# Altium PCB Inverter45attempt.PcbDoc (part 2 of 3)
Units mm, origin at the board's own origin, x right, y up, seen from the top; angles counter-clockwise.
Board outline 150 x 150 mm, 2 copper layers (Top Layer, Bottom Layer), stack 1.74 mm thick; 275 components, 191 nets, 1690 pads, 661 vias.
Unrouted connection lines stored in the file: 411.
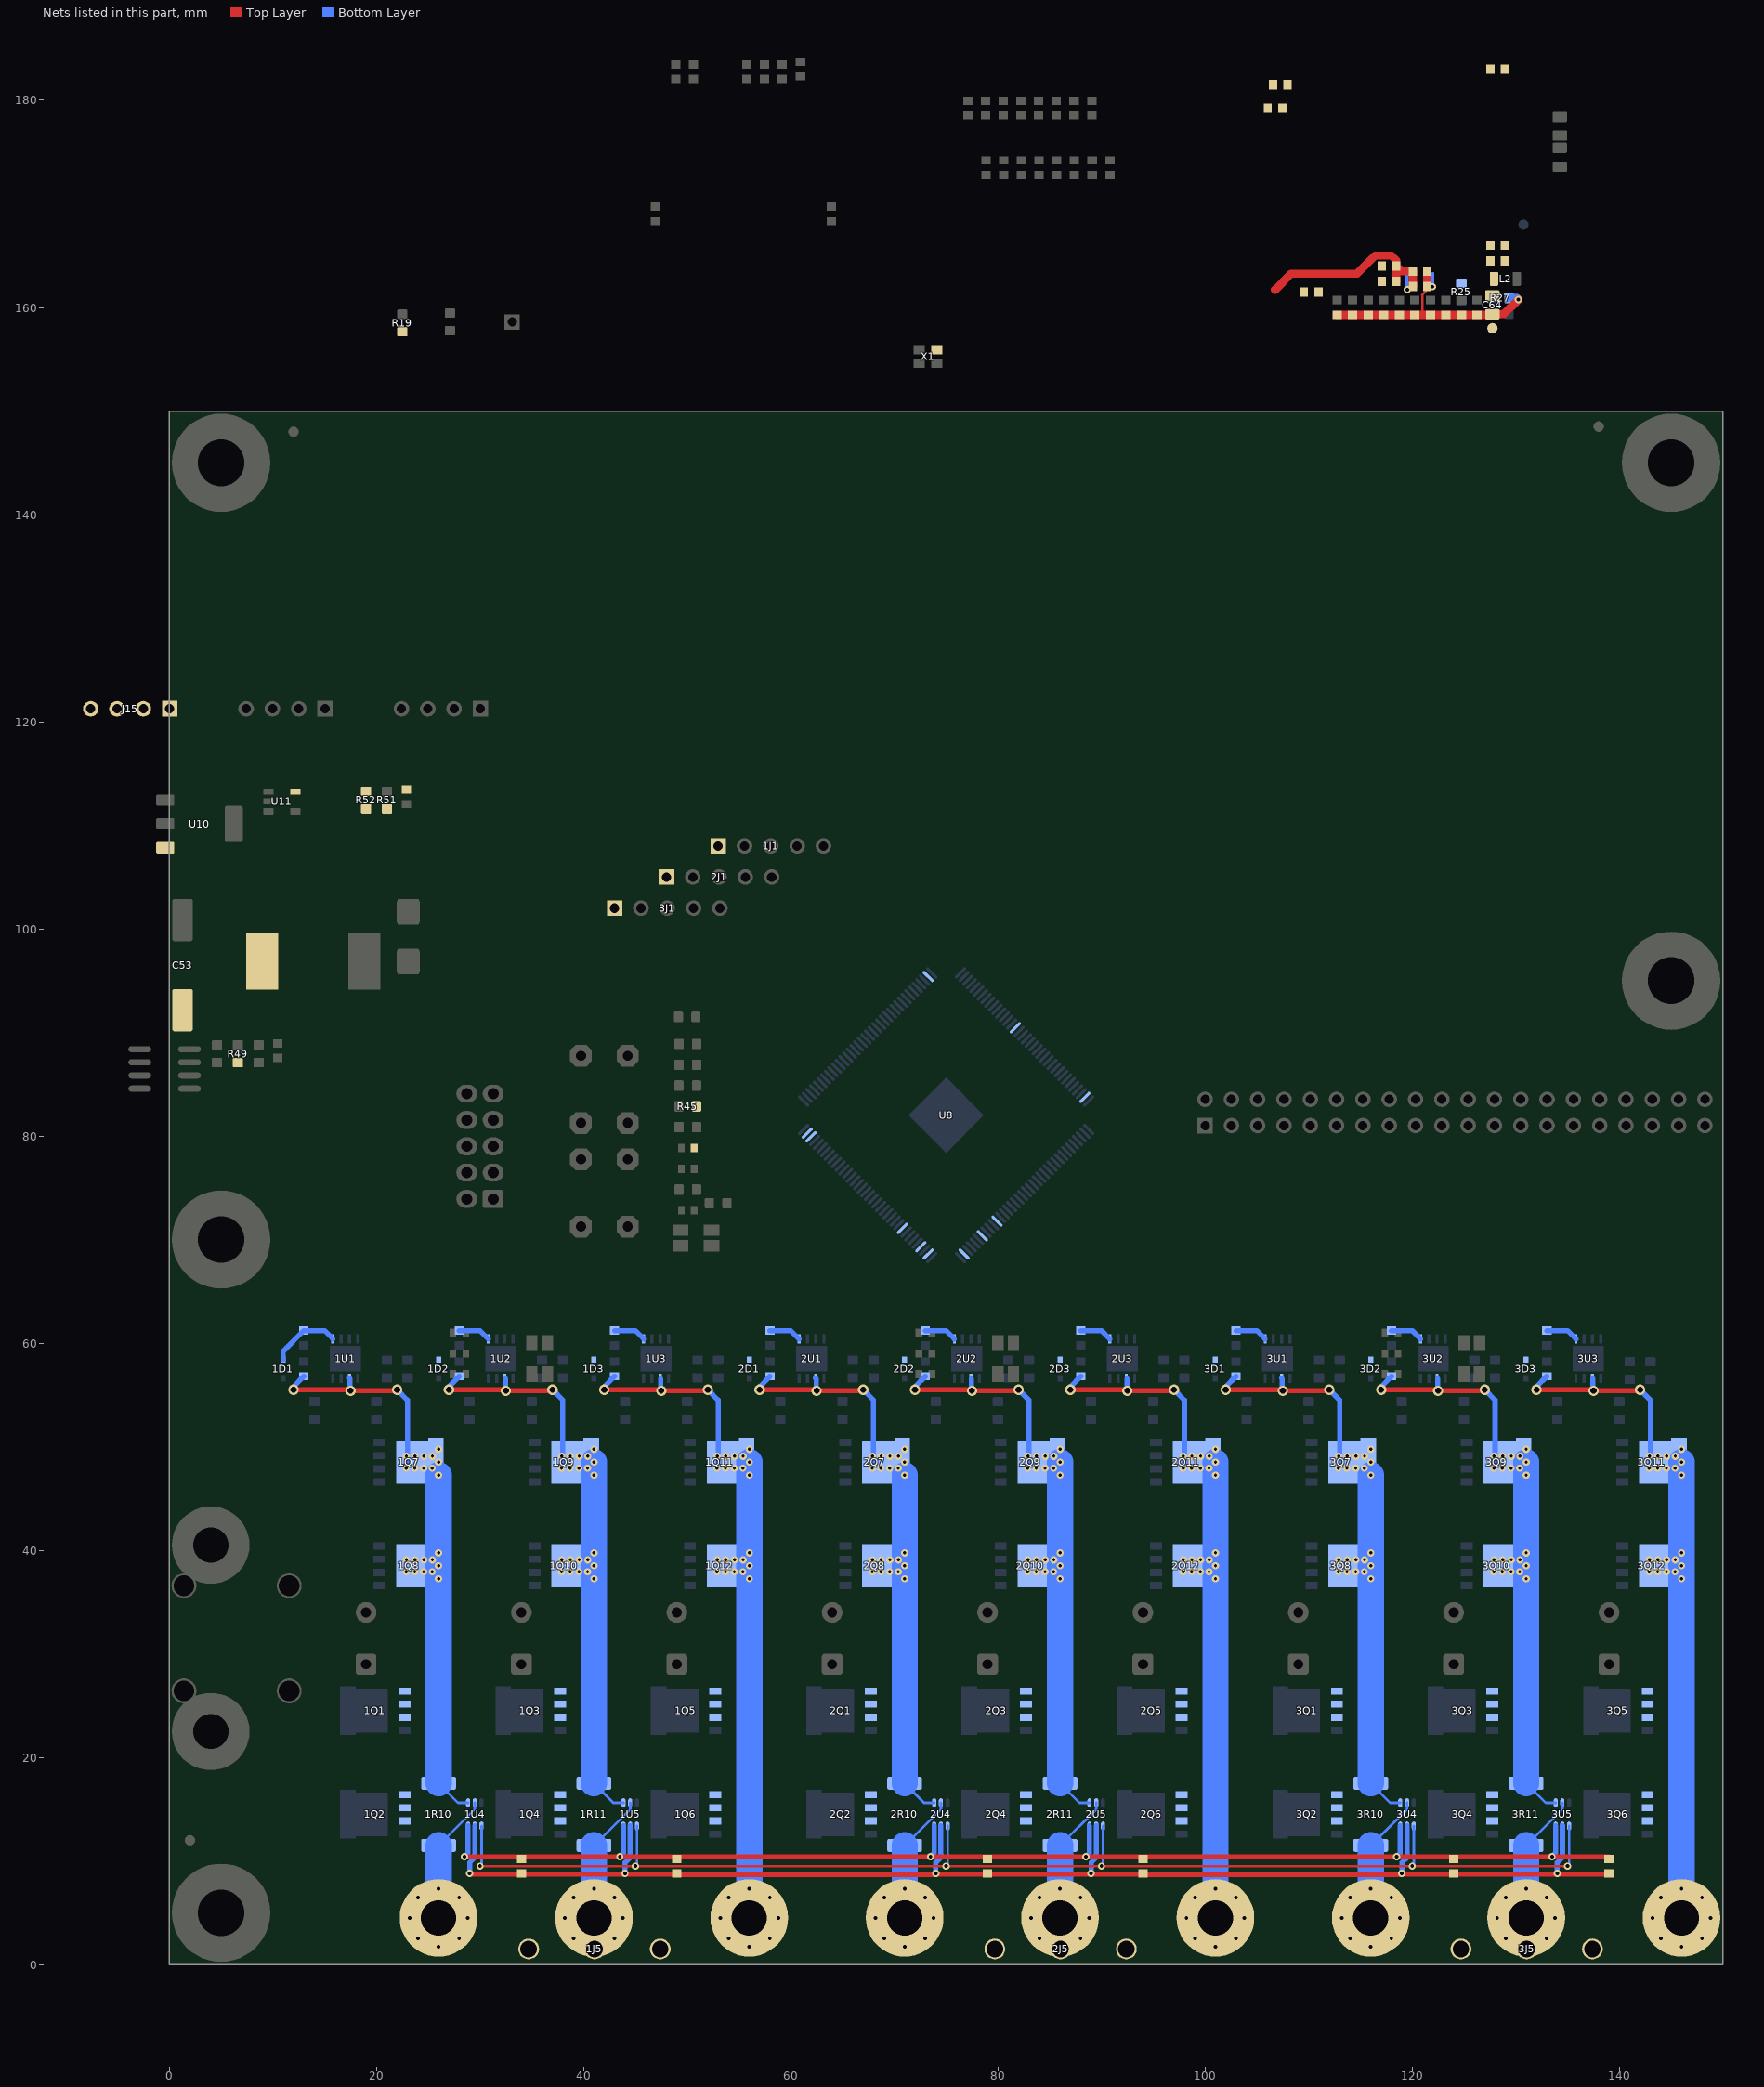
[diagram p2: the nets of this part, all layers, seen from the top]

## Part data (continued)
X1: "OSCILLATOR, SPXO, SG-210STF, 50 MHZ, SMD"

## Via types
v1: diameter 0.7, hole 0.3, Top Layer to Bottom Layer, 475 vias
v2: diameter 0.7, hole 0.35, Top Layer to Bottom Layer, 119 vias
v3: diameter 1.27, hole 0.5, Top Layer to Bottom Layer, 40 vias
v4: diameter 1, hole 0.6, Top Layer to Bottom Layer, 27 vias

## Nets (pads, with @x,y where several pads share a name; then routed paths per layer and width w, separated by ;. In a path a pad name is that pad's centre, name@x,y a point inside that pad or via, vN(x,y) a via of type N, cw(c..) or ccw(c..) an arc to the next point about the centre after c; other vN are vias at no path point)
1.65VREF: 1U4.1 1U5.1 2U4.1 2U5.1 3U4.1 3U5.1 R51.1 R52.2 | length 128.6
  Top Layer w0.254: v2(30,9.5) v2(45,9.5) v2(75,9.5) v2(90,9.5) v2(120,9.5) v2(135,9.5)
  Bottom Layer w0.254: v2(30,9.5) 30.15,9.65 1U4.1@30.15,13.375 ; v2(45,9.5) 45.15,9.65 1U5.1@45.15,13.375 ; v2(75,9.5) 75.15,9.65 2U4.1@75.15,13.375 ; v2(90,9.5) 90.15,9.65 2U5.1@90.15,13.375 ; v2(120,9.5) 120.15,9.65 3U4.1@120.15,13.375 ; v2(135,9.5) 135.15,9.65 3U5.1@135.15,13.375
1PH_A: 1J2.1 1J5.1 1R10.1 1U4.5 | length 12.6
  Bottom Layer w0.254: 1R10.1@26,11.5 29.5,15 1U4.5@29.5,15.625
  Bottom Layer w2.54: 1J2.1@26,4.5 v2(26,7.3) 1R10.1@26,11.5
  other v2: 26,1.7 24.02,2.52 27.98,2.52 23.2,4.5 28.8,4.5 24.02,6.48 27.98,6.48
1PH_A_Q: 1C4.1 1Q1.S 1Q2.S 1Q7.D 1Q8.D 1R10.2 1U1.6 1U4.4 | length 164.2
  Top Layer w0.5: v4(12,55.5) v4@17.4,55.5 ; v4(17.5,55.4) 21.9,55.4 v4(22,55.5)
  Bottom Layer w0.254: 1R10.2@26,17.5 27.875,15.625 1U4.4@28.85,15.625
  Bottom Layer w0.5: v4(12,55.5) 12,55.8 1C4.1@13,56.8 ; 1U1.6@17.4,56.605 17.45,56.555 17.45,55.45 v4(17.5,55.4) ; v4(22,55.5) 23,54.5 ; 1Q7.D@23,48.5 23,54.5 ; 1Q7.D@23,48.5 23,54.5 ; 1Q7.D@23,48.5 23,54.5 ; 1Q7.D@23,48.5 23,54.5 ; 1Q7.D@23,48.5 23,54.5 ; 1Q7.D@23,48.5 23,54.5 ; 1Q7.D@23,48.5 23,54.5 ; 1Q7.D@23,48.5 23,54.5 ; 1Q7.D@23,48.5 23,54.5 ; 1Q7.D@23,48.5 23,54.5 ; 1Q7.D@23,48.5 23,54.5 ; 1Q7.D@23,48.5 23,54.5 ; 1Q7.D@23,48.5 23,54.5 ; 1Q7.D@23,48.5 23,54.5
  Bottom Layer w2.54: 1R10.2@26,17.5 v1(26,37.25) ; v1(26,47.25) v1(26,39.75) ; v1(26,37.25) v1(26,38.5) ; v1(26,37.25) v1(26,38.5) ; v1(26,37.25) v1(26,38.5) ; v1(26,37.25) v1(26,38.5) ; v1(26,37.25) v1(26,38.5) ; v1(26,37.25) v1(26,38.5) ; v1(26,37.25) v1(26,38.5) ; v1(26,37.25) v1(26,38.5) ; v1(26,37.25) v1(26,38.5) ; v1(26,37.25) v1(26,38.5) ; v1(26,37.25) v1(26,38.5) ; v1(26,37.25) v1(26,38.5) ; v1(26,37.25) v1(26,38.5) ; v1(26,37.25) v1(26,38.5) ; v1(26,38.5) v1(26,39.75) ; v1(26,38.5) v1(26,39.75) ; v1(26,38.5) v1(26,39.75) ; v1(26,38.5) v1(26,39.75) ; v1(26,38.5) v1(26,39.75) ; v1(26,38.5) v1(26,39.75) ; v1(26,38.5) v1(26,39.75) ; v1(26,38.5) v1(26,39.75) ; v1(26,38.5) v1(26,39.75) ; v1(26,38.5) v1(26,39.75) ; v1(26,38.5) v1(26,39.75) ; v1(26,38.5) v1(26,39.75) ; v1(26,38.5) v1(26,39.75) ; v1(26,38.5) v1(26,39.75)
  other v1: 22.875,37.925 23.7,37.925 24.55,37.925 25.375,37.925 22.9,39.075 23.725,39.075 24.575,39.075 25.4,39.075 22.875,47.925 23.7,47.925 24.55,47.925 25.375,47.925 26,48.5 22.9,49.075 23.725,49.075 24.575,49.075 25.4,49.075 26,49.75
1PH_B: 1J3.1 1J5.2 1R11.1 1U5.5 | length 12.6
  Bottom Layer w0.254: 1R11.1@41,11.5 44.5,15 1U5.5@44.5,15.625
  Bottom Layer w2.54: 1J3.1@41,4.5 v2(41,7.3) 1R11.1@41,11.5
  other v2: 41,1.7 39.02,2.52 42.98,2.52 38.2,4.5 43.8,4.5 39.02,6.48 42.98,6.48
1PH_B_Q: 1C5.1 1Q3.S 1Q4.S 1Q9.D 1Q10.D 1R11.2 1U2.6 1U5.4 | length 181.1
  Top Layer w0.5: v4(27,55.5) v4@32.4,55.5 ; v4(32.5,55.4) v4@36.9,55.4
  Bottom Layer w0.254: 1R11.2@41,17.5 42.875,15.625 1U5.4@43.85,15.625
  Bottom Layer w0.5: v4@27,55.8 1C5.1@28,56.8 ; v4@32.45,55.45 1U2.6@32.45,56.555 ; v4(37,55.5) 38,54.5 ; 1Q9.D@38,48.5 38,54.5 ; 1Q9.D@38,48.5 38,54.5 ; 1Q9.D@38,48.5 38,54.5 ; 1Q9.D@38,48.5 38,54.5 ; 1Q9.D@38,48.5 38,54.5 ; 1Q9.D@38,48.5 38,54.5 ; 1Q9.D@38,48.5 38,54.5 ; 1Q9.D@38,48.5 38,54.5 ; 1Q9.D@38,48.5 38,54.5 ; 1Q9.D@38,48.5 38,54.5 ; 1Q9.D@38,48.5 38,54.5 ; 1Q9.D@38,48.5 38,54.5 ; 1Q9.D@38,48.5 38,54.5 ; 1Q9.D@38,48.5 38,54.5
  Bottom Layer w2.54: 1R11.2@41,17.5 v1(41,38.5) ; v1(41,37.25) v1(41,38.5) ; v1(41,37.25) v1(41,38.5) ; v1(41,37.25) v1(41,38.5) ; v1(41,37.25) v1(41,38.5) ; v1(41,37.25) v1(41,38.5) ; v1(41,37.25) v1(41,38.5) ; v1(41,37.25) v1(41,38.5) ; v1(41,37.25) v1(41,38.5) ; v1(41,37.25) v1(41,38.5) ; v1(41,37.25) v1(41,38.5) ; v1(41,37.25) v1(41,38.5) ; v1(41,37.25) v1(41,38.5) ; v1(41,37.25) v1(41,38.5) ; v1(41,38.5) v1(41,39.75) ; v1(41,38.5) v1(41,39.75) ; v1(41,38.5) v1(41,39.75) ; v1(41,38.5) v1(41,39.75) ; v1(41,38.5) v1(41,39.75) ; v1(41,38.5) v1(41,39.75) ; v1(41,38.5) v1(41,39.75) ; v1(41,38.5) v1(41,39.75) ; v1(41,38.5) v1(41,39.75) ; v1(41,38.5) v1(41,39.75) ; v1(41,38.5) v1(41,39.75) ; v1(41,38.5) v1(41,39.75) ; v1(41,38.5) v1(41,39.75) ; v1(41,38.5) v1(41,39.75) ; v1(41,39.75) v1(41,47.25) ; v1(41,47.25) v1(41,48.5) ; v1(41,47.25) v1(41,48.5) ; v1(41,47.25) v1(41,48.5) ; v1(41,47.25) v1(41,48.5) ; v1(41,47.25) v1(41,48.5) ; v1(41,47.25) v1(41,48.5) ; v1(41,47.25) v1(41,48.5) ; v1(41,47.25) v1(41,48.5) ; v1(41,47.25) v1(41,48.5) ; v1(41,47.25) v1(41,48.5) ; v1(41,47.25) v1(41,48.5) ; v1(41,47.25) v1(41,48.5) ; v1(41,47.25) v1(41,48.5) ; v1(41,47.25) v1(41,48.5)
  other v1: 37.875,37.925 38.7,37.925 39.55,37.925 40.375,37.925 37.9,39.075 38.725,39.075 39.575,39.075 40.4,39.075 37.875,47.925 38.7,47.925 39.55,47.925 40.375,47.925 37.9,49.075 38.725,49.075 39.575,49.075 40.4,49.075 41,49.75
1PH_C: 1C6.1 1J4.1 1J5.3 1Q5.S 1Q6.S 1Q11.D 1Q12.D 1U3.6 | length 190.5
  Top Layer w0.5: v4(42,55.5) v4@47.4,55.5 ; v4(47.5,55.4) v4@51.9,55.4
  Bottom Layer w0.5: v4@42,55.8 1C6.1@43,56.8 ; v4@47.45,55.45 1U3.6@47.45,56.555 ; v4(52,55.5) 53,54.5 ; 1Q11.D@53,48.5 53,54.5 ; 1Q11.D@53,48.5 53,54.5 ; 1Q11.D@53,48.5 53,54.5 ; 1Q11.D@53,48.5 53,54.5 ; 1Q11.D@53,48.5 53,54.5 ; 1Q11.D@53,48.5 53,54.5 ; 1Q11.D@53,48.5 53,54.5 ; 1Q11.D@53,48.5 53,54.5 ; 1Q11.D@53,48.5 53,54.5 ; 1Q11.D@53,48.5 53,54.5 ; 1Q11.D@53,48.5 53,54.5 ; 1Q11.D@53,48.5 53,54.5 ; 1Q11.D@53,48.5 53,54.5 ; 1Q11.D@53,48.5 53,54.5
  Bottom Layer w2.54: 1J4.1@56,4.5 v1(56,37.25) ; v1(56,37.25) v1(56,38.5) ; v1(56,37.25) v1(56,38.5) ; v1(56,37.25) v1(56,38.5) ; v1(56,37.25) v1(56,38.5) ; v1(56,37.25) v1(56,38.5) ; v1(56,37.25) v1(56,38.5) ; v1(56,37.25) v1(56,38.5) ; v1(56,37.25) v1(56,38.5) ; v1(56,37.25) v1(56,38.5) ; v1(56,37.25) v1(56,38.5) ; v1(56,37.25) v1(56,38.5) ; v1(56,37.25) v1(56,38.5) ; v1(56,37.25) v1(56,38.5) ; v1(56,37.25) v1(56,38.5) ; v1(56,38.5) v1(56,39.75) ; v1(56,38.5) v1(56,39.75) ; v1(56,38.5) v1(56,39.75) ; v1(56,38.5) v1(56,39.75) ; v1(56,38.5) v1(56,39.75) ; v1(56,38.5) v1(56,39.75) ; v1(56,38.5) v1(56,39.75) ; v1(56,38.5) v1(56,39.75) ; v1(56,38.5) v1(56,39.75) ; v1(56,38.5) v1(56,39.75) ; v1(56,38.5) v1(56,39.75) ; v1(56,38.5) v1(56,39.75) ; v1(56,38.5) v1(56,39.75) ; v1(56,38.5) v1(56,39.75) ; v1(56,39.75) v1(56,47.25) ; v1(56,47.25) v1(56,48.5) ; v1(56,47.25) v1(56,48.5) ; v1(56,47.25) v1(56,48.5) ; v1(56,47.25) v1(56,48.5) ; v1(56,47.25) v1(56,48.5) ; v1(56,47.25) v1(56,48.5) ; v1(56,47.25) v1(56,48.5) ; v1(56,47.25) v1(56,48.5) ; v1(56,47.25) v1(56,48.5) ; v1(56,47.25) v1(56,48.5) ; v1(56,47.25) v1(56,48.5) ; v1(56,47.25) v1(56,48.5) ; v1(56,47.25) v1(56,48.5) ; v1(56,47.25) v1(56,48.5)
  other v1: 52.875,37.925 53.7,37.925 54.55,37.925 55.375,37.925 52.9,39.075 53.725,39.075 54.575,39.075 55.4,39.075 52.875,47.925 53.7,47.925 54.55,47.925 55.375,47.925 52.9,49.075 53.725,49.075 54.575,49.075 55.4,49.075 56,49.75
  other v2: 56,1.7 54.02,2.52 57.98,2.52 53.2,4.5 58.8,4.5 54.02,6.48 57.98,6.48 56,7.3
2PH_A: 2J2.1 2J5.1 2R10.1 2U4.5 | length 12.6
  Bottom Layer w0.254: 2R10.1@71,11.5 74.5,15 2U4.5@74.5,15.625
  Bottom Layer w2.54: 2J2.1@71,4.5 v2(71,7.3) 2R10.1@71,11.5
  other v2: 71,1.7 69.02,2.52 72.98,2.52 68.2,4.5 73.8,4.5 69.02,6.48 72.98,6.48
2PH_A_Q: 2C4.1 2Q1.S 2Q2.S 2Q7.D 2Q8.D 2R10.2 2U1.6 2U4.4 | length 164.2
  Top Layer w0.5: v4(57,55.5) v4@62.4,55.5 ; v4(62.5,55.4) 66.9,55.4 v4(67,55.5)
  Bottom Layer w0.254: 2R10.2@71,17.5 72.875,15.625 2U4.4@73.85,15.625
  Bottom Layer w0.5: v4(57,55.5) 57,55.8 2C4.1@58,56.8 ; 2U1.6@62.4,56.605 62.45,56.555 62.45,55.45 v4(62.5,55.4) ; v4(67,55.5) 68,54.5 ; 2Q7.D@68,48.5 68,54.5 ; 2Q7.D@68,48.5 68,54.5 ; 2Q7.D@68,48.5 68,54.5 ; 2Q7.D@68,48.5 68,54.5 ; 2Q7.D@68,48.5 68,54.5 ; 2Q7.D@68,48.5 68,54.5 ; 2Q7.D@68,48.5 68,54.5 ; 2Q7.D@68,48.5 68,54.5 ; 2Q7.D@68,48.5 68,54.5 ; 2Q7.D@68,48.5 68,54.5 ; 2Q7.D@68,48.5 68,54.5 ; 2Q7.D@68,48.5 68,54.5 ; 2Q7.D@68,48.5 68,54.5 ; 2Q7.D@68,48.5 68,54.5
  Bottom Layer w2.54: 2R10.2@71,17.5 v1(71,37.25) ; v1(71,47.25) v1(71,39.75) ; v1(71,37.25) v1(71,38.5) ; v1(71,37.25) v1(71,38.5) ; v1(71,37.25) v1(71,38.5) ; v1(71,37.25) v1(71,38.5) ; v1(71,37.25) v1(71,38.5) ; v1(71,37.25) v1(71,38.5) ; v1(71,37.25) v1(71,38.5) ; v1(71,37.25) v1(71,38.5) ; v1(71,37.25) v1(71,38.5) ; v1(71,37.25) v1(71,38.5) ; v1(71,37.25) v1(71,38.5) ; v1(71,37.25) v1(71,38.5) ; v1(71,37.25) v1(71,38.5) ; v1(71,37.25) v1(71,38.5) ; v1(71,38.5) v1(71,39.75) ; v1(71,38.5) v1(71,39.75) ; v1(71,38.5) v1(71,39.75) ; v1(71,38.5) v1(71,39.75) ; v1(71,38.5) v1(71,39.75) ; v1(71,38.5) v1(71,39.75) ; v1(71,38.5) v1(71,39.75) ; v1(71,38.5) v1(71,39.75) ; v1(71,38.5) v1(71,39.75) ; v1(71,38.5) v1(71,39.75) ; v1(71,38.5) v1(71,39.75) ; v1(71,38.5) v1(71,39.75) ; v1(71,38.5) v1(71,39.75) ; v1(71,38.5) v1(71,39.75)
  other v1: 67.875,37.925 68.7,37.925 69.55,37.925 70.375,37.925 67.9,39.075 68.725,39.075 69.575,39.075 70.4,39.075 67.875,47.925 68.7,47.925 69.55,47.925 70.375,47.925 71,48.5 67.9,49.075 68.725,49.075 69.575,49.075 70.4,49.075 71,49.75
2PH_B: 2J3.1 2J5.2 2R11.1 2U5.5 | length 12.6
  Bottom Layer w0.254: 2R11.1@86,11.5 89.5,15 2U5.5@89.5,15.625
  Bottom Layer w2.54: 2J3.1@86,4.5 v2(86,7.3) 2R11.1@86,11.5
  other v2: 86,1.7 84.02,2.52 87.98,2.52 83.2,4.5 88.8,4.5 84.02,6.48 87.98,6.48
2PH_B_Q: 2C5.1 2Q3.S 2Q4.S 2Q9.D 2Q10.D 2R11.2 2U2.6 2U5.4 | length 181.1
  Top Layer w0.5: v4(72,55.5) v4@77.4,55.5 ; v4(77.5,55.4) v4@81.9,55.4
  Bottom Layer w0.254: 2R11.2@86,17.5 87.875,15.625 2U5.4@88.85,15.625
  Bottom Layer w0.5: v4@72,55.8 2C5.1@73,56.8 ; v4@77.45,55.45 2U2.6@77.45,56.555 ; v4(82,55.5) 83,54.5 ; 2Q9.D@83,48.5 83,54.5 ; 2Q9.D@83,48.5 83,54.5 ; 2Q9.D@83,48.5 83,54.5 ; 2Q9.D@83,48.5 83,54.5 ; 2Q9.D@83,48.5 83,54.5 ; 2Q9.D@83,48.5 83,54.5 ; 2Q9.D@83,48.5 83,54.5 ; 2Q9.D@83,48.5 83,54.5 ; 2Q9.D@83,48.5 83,54.5 ; 2Q9.D@83,48.5 83,54.5 ; 2Q9.D@83,48.5 83,54.5 ; 2Q9.D@83,48.5 83,54.5 ; 2Q9.D@83,48.5 83,54.5 ; 2Q9.D@83,48.5 83,54.5
  Bottom Layer w2.54: 2R11.2@86,17.5 v1(86,38.5) ; v1(86,37.25) v1(86,38.5) ; v1(86,37.25) v1(86,38.5) ; v1(86,37.25) v1(86,38.5) ; v1(86,37.25) v1(86,38.5) ; v1(86,37.25) v1(86,38.5) ; v1(86,37.25) v1(86,38.5) ; v1(86,37.25) v1(86,38.5) ; v1(86,37.25) v1(86,38.5) ; v1(86,37.25) v1(86,38.5) ; v1(86,37.25) v1(86,38.5) ; v1(86,37.25) v1(86,38.5) ; v1(86,37.25) v1(86,38.5) ; v1(86,37.25) v1(86,38.5) ; v1(86,38.5) v1(86,39.75) ; v1(86,38.5) v1(86,39.75) ; v1(86,38.5) v1(86,39.75) ; v1(86,38.5) v1(86,39.75) ; v1(86,38.5) v1(86,39.75) ; v1(86,38.5) v1(86,39.75) ; v1(86,38.5) v1(86,39.75) ; v1(86,38.5) v1(86,39.75) ; v1(86,38.5) v1(86,39.75) ; v1(86,38.5) v1(86,39.75) ; v1(86,38.5) v1(86,39.75) ; v1(86,38.5) v1(86,39.75) ; v1(86,38.5) v1(86,39.75) ; v1(86,38.5) v1(86,39.75) ; v1(86,39.75) v1(86,47.25) ; v1(86,47.25) v1(86,48.5) ; v1(86,47.25) v1(86,48.5) ; v1(86,47.25) v1(86,48.5) ; v1(86,47.25) v1(86,48.5) ; v1(86,47.25) v1(86,48.5) ; v1(86,47.25) v1(86,48.5) ; v1(86,47.25) v1(86,48.5) ; v1(86,47.25) v1(86,48.5) ; v1(86,47.25) v1(86,48.5) ; v1(86,47.25) v1(86,48.5) ; v1(86,47.25) v1(86,48.5) ; v1(86,47.25) v1(86,48.5) ; v1(86,47.25) v1(86,48.5) ; v1(86,47.25) v1(86,48.5)
  other v1: 82.875,37.925 83.7,37.925 84.55,37.925 85.375,37.925 82.9,39.075 83.725,39.075 84.575,39.075 85.4,39.075 82.875,47.925 83.7,47.925 84.55,47.925 85.375,47.925 82.9,49.075 83.725,49.075 84.575,49.075 85.4,49.075 86,49.75
2PH_C: 2C6.1 2J4.1 2J5.3 2Q5.S 2Q6.S 2Q11.D 2Q12.D 2U3.6 | length 190.5
  Top Layer w0.5: v4(87,55.5) v4@92.4,55.5 ; v4(92.5,55.4) v4@96.9,55.4
  Bottom Layer w0.5: v4@87,55.8 2C6.1@88,56.8 ; v4@92.45,55.45 2U3.6@92.45,56.555 ; v4(97,55.5) 98,54.5 ; 2Q11.D@98,48.5 98,54.5 ; 2Q11.D@98,48.5 98,54.5 ; 2Q11.D@98,48.5 98,54.5 ; 2Q11.D@98,48.5 98,54.5 ; 2Q11.D@98,48.5 98,54.5 ; 2Q11.D@98,48.5 98,54.5 ; 2Q11.D@98,48.5 98,54.5 ; 2Q11.D@98,48.5 98,54.5 ; 2Q11.D@98,48.5 98,54.5 ; 2Q11.D@98,48.5 98,54.5 ; 2Q11.D@98,48.5 98,54.5 ; 2Q11.D@98,48.5 98,54.5 ; 2Q11.D@98,48.5 98,54.5 ; 2Q11.D@98,48.5 98,54.5
  Bottom Layer w2.54: 2J4.1@101,4.5 v1(101,37.25) ; v1(101,37.25) v1(101,38.5) ; v1(101,37.25) v1(101,38.5) ; v1(101,37.25) v1(101,38.5) ; v1(101,37.25) v1(101,38.5) ; v1(101,37.25) v1(101,38.5) ; v1(101,37.25) v1(101,38.5) ; v1(101,37.25) v1(101,38.5) ; v1(101,37.25) v1(101,38.5) ; v1(101,37.25) v1(101,38.5) ; v1(101,37.25) v1(101,38.5) ; v1(101,37.25) v1(101,38.5) ; v1(101,37.25) v1(101,38.5) ; v1(101,37.25) v1(101,38.5) ; v1(101,37.25) v1(101,38.5) ; v1(101,38.5) v1(101,39.75) ; v1(101,38.5) v1(101,39.75) ; v1(101,38.5) v1(101,39.75) ; v1(101,38.5) v1(101,39.75) ; v1(101,38.5) v1(101,39.75) ; v1(101,38.5) v1(101,39.75) ; v1(101,38.5) v1(101,39.75) ; v1(101,38.5) v1(101,39.75) ; v1(101,38.5) v1(101,39.75) ; v1(101,38.5) v1(101,39.75) ; v1(101,38.5) v1(101,39.75) ; v1(101,38.5) v1(101,39.75) ; v1(101,38.5) v1(101,39.75) ; v1(101,38.5) v1(101,39.75) ; v1(101,39.75) v1(101,47.25) ; v1(101,47.25) v1(101,48.5) ; v1(101,47.25) v1(101,48.5) ; v1(101,47.25) v1(101,48.5) ; v1(101,47.25) v1(101,48.5) ; v1(101,47.25) v1(101,48.5) ; v1(101,47.25) v1(101,48.5) ; v1(101,47.25) v1(101,48.5) ; v1(101,47.25) v1(101,48.5) ; v1(101,47.25) v1(101,48.5) ; v1(101,47.25) v1(101,48.5) ; v1(101,47.25) v1(101,48.5) ; v1(101,47.25) v1(101,48.5) ; v1(101,47.25) v1(101,48.5) ; v1(101,47.25) v1(101,48.5)
  other v1: 97.875,37.925 98.7,37.925 99.55,37.925 100.375,37.925 97.9,39.075 98.725,39.075 99.575,39.075 100.4,39.075 97.875,47.925 98.7,47.925 99.55,47.925 100.375,47.925 97.9,49.075 98.725,49.075 99.575,49.075 100.4,49.075 101,49.75
  other v2: 101,1.7 99.02,2.52 102.98,2.52 98.2,4.5 103.8,4.5 99.02,6.48 102.98,6.48 101,7.3
3PH_A: 3J2.1 3J5.1 3R10.1 3U4.5 | length 12.6
  Bottom Layer w0.254: 3R10.1@116,11.5 119.5,15 3U4.5@119.5,15.625
  Bottom Layer w2.54: 3J2.1@116,4.5 v2(116,7.3) 3R10.1@116,11.5
  other v2: 116,1.7 114.02,2.52 117.98,2.52 113.2,4.5 118.8,4.5 114.02,6.48 117.98,6.48
3PH_A_Q: 3C4.1 3Q1.S 3Q2.S 3Q7.D 3Q8.D 3R10.2 3U1.6 3U4.4 | length 164.2
  Top Layer w0.5: v4(102,55.5) v4@107.4,55.5 ; v4(107.5,55.4) 111.9,55.4 v4(112,55.5)
  Bottom Layer w0.254: 3R10.2@116,17.5 117.875,15.625 3U4.4@118.85,15.625
  Bottom Layer w0.5: v4(102,55.5) 102,55.8 3C4.1@103,56.8 ; 3U1.6@107.4,56.605 107.45,56.555 107.45,55.45 v4(107.5,55.4) ; v4(112,55.5) 113,54.5 ; 3Q7.D@113,48.5 113,54.5 ; 3Q7.D@113,48.5 113,54.5 ; 3Q7.D@113,48.5 113,54.5 ; 3Q7.D@113,48.5 113,54.5 ; 3Q7.D@113,48.5 113,54.5 ; 3Q7.D@113,48.5 113,54.5 ; 3Q7.D@113,48.5 113,54.5 ; 3Q7.D@113,48.5 113,54.5 ; 3Q7.D@113,48.5 113,54.5 ; 3Q7.D@113,48.5 113,54.5 ; 3Q7.D@113,48.5 113,54.5 ; 3Q7.D@113,48.5 113,54.5 ; 3Q7.D@113,48.5 113,54.5 ; 3Q7.D@113,48.5 113,54.5
  Bottom Layer w2.54: 3R10.2@116,17.5 v1(116,37.25) ; v1(116,47.25) v1(116,39.75) ; v1(116,37.25) v1(116,38.5) ; v1(116,37.25) v1(116,38.5) ; v1(116,37.25) v1(116,38.5) ; v1(116,37.25) v1(116,38.5) ; v1(116,37.25) v1(116,38.5) ; v1(116,37.25) v1(116,38.5) ; v1(116,37.25) v1(116,38.5) ; v1(116,37.25) v1(116,38.5) ; v1(116,37.25) v1(116,38.5) ; v1(116,37.25) v1(116,38.5) ; v1(116,37.25) v1(116,38.5) ; v1(116,37.25) v1(116,38.5) ; v1(116,37.25) v1(116,38.5) ; v1(116,37.25) v1(116,38.5) ; v1(116,38.5) v1(116,39.75) ; v1(116,38.5) v1(116,39.75) ; v1(116,38.5) v1(116,39.75) ; v1(116,38.5) v1(116,39.75) ; v1(116,38.5) v1(116,39.75) ; v1(116,38.5) v1(116,39.75) ; v1(116,38.5) v1(116,39.75) ; v1(116,38.5) v1(116,39.75) ; v1(116,38.5) v1(116,39.75) ; v1(116,38.5) v1(116,39.75) ; v1(116,38.5) v1(116,39.75) ; v1(116,38.5) v1(116,39.75) ; v1(116,38.5) v1(116,39.75) ; v1(116,38.5) v1(116,39.75)
  other v1: 112.875,37.925 113.7,37.925 114.55,37.925 115.375,37.925 112.9,39.075 113.725,39.075 114.575,39.075 115.4,39.075 112.875,47.925 113.7,47.925 114.55,47.925 115.375,47.925 116,48.5 112.9,49.075 113.725,49.075 114.575,49.075 115.4,49.075 116,49.75
3PH_B: 3J3.1 3J5.2 3R11.1 3U5.5 | length 12.6
  Bottom Layer w0.254: 3R11.1@131,11.5 134.5,15 3U5.5@134.5,15.625
  Bottom Layer w2.54: 3J3.1@131,4.5 v2(131,7.3) 3R11.1@131,11.5
  other v2: 131,1.7 129.02,2.52 132.98,2.52 128.2,4.5 133.8,4.5 129.02,6.48 132.98,6.48
3PH_B_Q: 3C5.1 3Q3.S 3Q4.S 3Q9.D 3Q10.D 3R11.2 3U2.6 3U5.4 | length 181.1
  Top Layer w0.5: v4(117,55.5) v4@122.4,55.5 ; v4(122.5,55.4) v4@126.9,55.4
  Bottom Layer w0.254: 3R11.2@131,17.5 132.875,15.625 3U5.4@133.85,15.625
  Bottom Layer w0.5: v4@117,55.8 3C5.1@118,56.8 ; v4@122.45,55.45 3U2.6@122.45,56.555 ; v4(127,55.5) 128,54.5 ; 3Q9.D@128,48.5 128,54.5 ; 3Q9.D@128,48.5 128,54.5 ; 3Q9.D@128,48.5 128,54.5 ; 3Q9.D@128,48.5 128,54.5 ; 3Q9.D@128,48.5 128,54.5 ; 3Q9.D@128,48.5 128,54.5 ; 3Q9.D@128,48.5 128,54.5 ; 3Q9.D@128,48.5 128,54.5 ; 3Q9.D@128,48.5 128,54.5 ; 3Q9.D@128,48.5 128,54.5 ; 3Q9.D@128,48.5 128,54.5 ; 3Q9.D@128,48.5 128,54.5 ; 3Q9.D@128,48.5 128,54.5 ; 3Q9.D@128,48.5 128,54.5
  Bottom Layer w2.54: 3R11.2@131,17.5 v1(131,38.5) ; v1(131,37.25) v1(131,38.5) ; v1(131,37.25) v1(131,38.5) ; v1(131,37.25) v1(131,38.5) ; v1(131,37.25) v1(131,38.5) ; v1(131,37.25) v1(131,38.5) ; v1(131,37.25) v1(131,38.5) ; v1(131,37.25) v1(131,38.5) ; v1(131,37.25) v1(131,38.5) ; v1(131,37.25) v1(131,38.5) ; v1(131,37.25) v1(131,38.5) ; v1(131,37.25) v1(131,38.5) ; v1(131,37.25) v1(131,38.5) ; v1(131,37.25) v1(131,38.5) ; v1(131,38.5) v1(131,39.75) ; v1(131,38.5) v1(131,39.75) ; v1(131,38.5) v1(131,39.75) ; v1(131,38.5) v1(131,39.75) ; v1(131,38.5) v1(131,39.75) ; v1(131,38.5) v1(131,39.75) ; v1(131,38.5) v1(131,39.75) ; v1(131,38.5) v1(131,39.75) ; v1(131,38.5) v1(131,39.75) ; v1(131,38.5) v1(131,39.75) ; v1(131,38.5) v1(131,39.75) ; v1(131,38.5) v1(131,39.75) ; v1(131,38.5) v1(131,39.75) ; v1(131,38.5) v1(131,39.75) ; v1(131,39.75) v1(131,47.25) ; v1(131,47.25) v1(131,48.5) ; v1(131,47.25) v1(131,48.5) ; v1(131,47.25) v1(131,48.5) ; v1(131,47.25) v1(131,48.5) ; v1(131,47.25) v1(131,48.5) ; v1(131,47.25) v1(131,48.5) ; v1(131,47.25) v1(131,48.5) ; v1(131,47.25) v1(131,48.5) ; v1(131,47.25) v1(131,48.5) ; v1(131,47.25) v1(131,48.5) ; v1(131,47.25) v1(131,48.5) ; v1(131,47.25) v1(131,48.5) ; v1(131,47.25) v1(131,48.5) ; v1(131,47.25) v1(131,48.5)
  other v1: 127.875,37.925 128.7,37.925 129.55,37.925 130.375,37.925 127.9,39.075 128.725,39.075 129.575,39.075 130.4,39.075 127.875,47.925 128.7,47.925 129.55,47.925 130.375,47.925 127.9,49.075 128.725,49.075 129.575,49.075 130.4,49.075 131,49.75
3PH_C: 3C6.1 3J4.1 3J5.3 3Q5.S 3Q6.S 3Q11.D 3Q12.D 3U3.6 | length 190.5
  Top Layer w0.5: v4(132,55.5) v4@137.4,55.5 ; v4(137.5,55.4) v4@141.9,55.4
  Bottom Layer w0.5: v4@132,55.8 3C6.1@133,56.8 ; v4@137.45,55.45 3U3.6@137.45,56.555 ; v4(142,55.5) 143,54.5 ; 3Q11.D@143,48.5 143,54.5 ; 3Q11.D@143,48.5 143,54.5 ; 3Q11.D@143,48.5 143,54.5 ; 3Q11.D@143,48.5 143,54.5 ; 3Q11.D@143,48.5 143,54.5 ; 3Q11.D@143,48.5 143,54.5 ; 3Q11.D@143,48.5 143,54.5 ; 3Q11.D@143,48.5 143,54.5 ; 3Q11.D@143,48.5 143,54.5 ; 3Q11.D@143,48.5 143,54.5 ; 3Q11.D@143,48.5 143,54.5 ; 3Q11.D@143,48.5 143,54.5 ; 3Q11.D@143,48.5 143,54.5 ; 3Q11.D@143,48.5 143,54.5
  Bottom Layer w2.54: 3J4.1@146,4.5 v1(146,37.25) ; v1(146,37.25) v1(146,38.5) ; v1(146,37.25) v1(146,38.5) ; v1(146,37.25) v1(146,38.5) ; v1(146,37.25) v1(146,38.5) ; v1(146,37.25) v1(146,38.5) ; v1(146,37.25) v1(146,38.5) ; v1(146,37.25) v1(146,38.5) ; v1(146,37.25) v1(146,38.5) ; v1(146,37.25) v1(146,38.5) ; v1(146,37.25) v1(146,38.5) ; v1(146,37.25) v1(146,38.5) ; v1(146,37.25) v1(146,38.5) ; v1(146,37.25) v1(146,38.5) ; v1(146,37.25) v1(146,38.5) ; v1(146,38.5) v1(146,39.75) ; v1(146,38.5) v1(146,39.75) ; v1(146,38.5) v1(146,39.75) ; v1(146,38.5) v1(146,39.75) ; v1(146,38.5) v1(146,39.75) ; v1(146,38.5) v1(146,39.75) ; v1(146,38.5) v1(146,39.75) ; v1(146,38.5) v1(146,39.75) ; v1(146,38.5) v1(146,39.75) ; v1(146,38.5) v1(146,39.75) ; v1(146,38.5) v1(146,39.75) ; v1(146,38.5) v1(146,39.75) ; v1(146,38.5) v1(146,39.75) ; v1(146,38.5) v1(146,39.75) ; v1(146,39.75) v1(146,47.25) ; v1(146,47.25) v1(146,48.5) ; v1(146,47.25) v1(146,48.5) ; v1(146,47.25) v1(146,48.5) ; v1(146,47.25) v1(146,48.5) ; v1(146,47.25) v1(146,48.5) ; v1(146,47.25) v1(146,48.5) ; v1(146,47.25) v1(146,48.5) ; v1(146,47.25) v1(146,48.5) ; v1(146,47.25) v1(146,48.5) ; v1(146,47.25) v1(146,48.5) ; v1(146,47.25) v1(146,48.5) ; v1(146,47.25) v1(146,48.5) ; v1(146,47.25) v1(146,48.5) ; v1(146,47.25) v1(146,48.5)
  other v1: 142.875,37.925 143.7,37.925 144.55,37.925 145.375,37.925 142.9,39.075 143.725,39.075 144.575,39.075 145.4,39.075 142.875,47.925 143.7,47.925 144.55,47.925 145.375,47.925 142.9,49.075 143.725,49.075 144.575,49.075 145.4,49.075 146,49.75
  other v2: 146,1.7 144.02,2.52 147.98,2.52 143.2,4.5 148.8,4.5 144.02,6.48 147.98,6.48 146,7.3
5V: 1J1.1 2J1.1 3J1.1 C53.1 J15.1 J15.2 J15.3 J15.4 L1.1 R49.1 U10.3
12V: 1C7.2 1C8.2 1C9.2 1D1.A 1D2.A 1D3.A 1U1.1 1U2.1 1U3.1 2C7.2 2C8.2 2C9.2 2D1.A 2D2.A 2D3.A 2U1.1 2U2.1 2U3.1 3C7.2 3C8.2 3C9.2 3D1.A 3D2.A 3D3.A 3U1.1 3U2.1 3U3.1 C65.2 U11.5 | length 31.8
  Bottom Layer w0.5: 1D1.A@11,58.4 11,59.219 12.981,61.2 1C7.2@13,61.2 14.995,61.2 1U1.1@15.8,60.395 ; 1C8.2@28,61.2 29.995,61.2 1U2.1@30.8,60.395 ; 1C9.2@43,61.2 44.995,61.2 1U3.1@45.8,60.395 ; 2C7.2@58,61.2 59.995,61.2 2U1.1@60.8,60.395 ; 2C8.2@73,61.2 74.995,61.2 2U2.1@75.8,60.395 ; 2C9.2@88,61.2 89.995,61.2 2U3.1@90.8,60.395 ; 3C7.2@103,61.2 104.995,61.2 3U1.1@105.8,60.395 ; 3C8.2@118,61.2 119.995,61.2 3U2.1@120.8,60.395 ; 3C9.2@133,61.2 134.995,61.2 3U3.1@135.8,60.395
AGND: 1C10.1 1C11.1 1U4.2 1U5.2 2C10.1 2C11.1 2U4.2 2U5.2 3C10.1 3C11.1 3U4.2 3U5.2 C16.1 C17.1 C18.1 C19.1 C20.1 C21.1 C22.1 C23.1 C24.1 C25.1 C26.1 C27.1 C45.1 C46.1 C47.1 C48.1 C49.1 C50.1 C51.1 C52.1 C64.1 R19.1 R27.1 R52.1 SP1.2 U8.4 | length 2013.1
  Top Layer w0.254: 120.979,159.3 120.979,161.216 120.973,161.223 121.45,161.7 C26.1@121.45,162
  Top Layer w0.5: 1C11.1@49,8.8 1C11.1@49,8.748 ; v2@29,8.748 34,8.748 1C11.1@49,8.748 ; v2@29,8.748 1C11.1@49,8.748 ; v2@29,8.748 1C11.1@49,8.748 ; v2@29,8.748 1C11.1@49,8.748 ; v2@29,8.748 v2@44,8.748 ; v2@29,8.748 1C11.1@49,8.748 ; v2@29,8.748 1C11.1@49,8.748 ; v2@29,8.748 1C11.1@49,8.748 ; v2@29,8.748 1C11.1@49,8.748 ; v2@29,8.748 1C11.1@49,8.748 ; v2@29,8.748 1C11.1@49,8.748 ; v2@29,8.748 1C11.1@49,8.748 ; v2@29,8.748 1C11.1@49,8.748 ; v2@29,8.748 1C11.1@49,8.748 ; v2@29,8.748 1C11.1@49,8.748 ; v2@29,8.748 v2@44,8.748 ; v2@44,8.748 1C11.1@49,8.748 ; v2@44,8.748 1C11.1@49,8.748 ; 1C11.1@49,8.7 v2@74,8.7 ; 1C11.1@49,8.7 v2@74,8.7 ; 1C11.1@49,8.7 v2@74,8.7 ; 1C11.1@49,8.7 v2@74,8.7 ; 1C11.1@49,8.7 v2@74,8.7 ; 1C11.1@49,8.7 v2@74,8.7 ; 1C11.1@49,8.7 v2@74,8.7 ; 1C11.1@49,8.7 v2@74,8.7 ; 1C11.1@49,8.7 v2@74,8.7 ; 1C11.1@49,8.7 v2@74,8.7 ; 1C11.1@49,8.7 v2@74,8.7 ; 1C11.1@49,8.7 v2@74,8.7 ; 1C11.1@49,8.7 v2@74,8.7 ; 1C11.1@49,8.7 v2@74,8.7 ; 1C11.1@49,8.7 1C11.1@49,8.748 ; v2@74,8.7 v2@74,8.748 ; v2@74,8.748 2C11.1@94,8.748 ; v2@74,8.748 2C10.1@79,8.748 ; v2@74,8.748 2C10.1@79,8.748 ; v2@74,8.748 2C10.1@79,8.748 ; v2@74,8.748 2C10.1@79,8.748 ; v2@74,8.748 2C10.1@79,8.748 ; v2@74,8.748 2C10.1@79,8.748 ; v2@74,8.748 2C10.1@79,8.748 ; v2@74,8.748 2C10.1@79,8.748 ; v2@74,8.748 2C11.1@94,8.748 ; v2@74,8.748 2C11.1@94,8.748 ; v2@74,8.748 2C11.1@94,8.748 ; v2@74,8.748 2C11.1@94,8.748 ; v2@74,8.748 2C11.1@94,8.748 ; v2@74,8.748 2C11.1@94,8.748 ; v2@74,8.748 2C11.1@94,8.748 ; v2@74,8.748 2C11.1@94,8.748 ; v2@74,8.748 2C11.1@94,8.748 ; v2@74,8.748 2C11.1@94,8.748 ; v2@74,8.748 2C11.1@94,8.748 ; v2@74,8.748 2C11.1@94,8.748 ; v2@74,8.748 2C10.1@79,8.748 ; 2C10.1@79,8.748 2C11.1@94,8.748 ; 2C10.1@79,8.748 2C11.1@94,8.748 ; 2C10.1@79,8.748 2C11.1@94,8.748 ; 2C10.1@79,8.748 2C11.1@94,8.748 ; 2C10.1@79,8.748 2C11.1@94,8.748 ; 2C10.1@79,8.748 2C11.1@94,8.748 ; 2C10.1@79,8.748 2C11.1@94,8.748 ; 2C10.1@79,8.748 2C11.1@94,8.748 ; 2C10.1@79,8.748 2C11.1@94,8.748 ; 2C11.1@94,8.7 v2@119,8.7 ; 2C11.1@94,8.7 v2@119,8.7 ; 2C11.1@94,8.7 v2@119,8.7 ; 2C11.1@94,8.7 v2@119,8.7 ; 2C11.1@94,8.7 v2@119,8.7 ; 2C11.1@94,8.7 v2@119,8.7 ; 2C11.1@94,8.7 v2@119,8.7 ; 2C11.1@94,8.7 v2@119,8.7 ; 2C11.1@94,8.7 v2@119,8.7 ; 2C11.1@94,8.7 v2@119,8.7 ; 2C11.1@94,8.7 v2@119,8.7 ; 2C11.1@94,8.7 v2@119,8.7 ; 2C11.1@94,8.7 v2@119,8.7 ; 2C11.1@94,8.7 v2@119,8.7 ; v2@119,8.748 3C10.1@124,8.748 ; v2@119,8.748 3C10.1@124,8.748 ; v2@119,8.748 3C10.1@124,8.748 ; v2@119,8.748 3C10.1@124,8.748 ; v2@119,8.748 3C10.1@124,8.748 ; v2@119,8.748 3C10.1@124,8.748 ; v2@119,8.748 3C10.1@124,8.748 ; v2@119,8.748 3C10.1@124,8.748 ; v2@119,8.748 3C10.1@124,8.748 ; v2@119,8.748 3C10.1@124,8.748 ; v2@119,8.748 3C11.1@139,8.748 ; v2@119,8.748 3C11.1@139,8.748 ; v2@119,8.748 3C11.1@139,8.748 ; v2@119,8.748 3C11.1@139,8.748 ; v2@119,8.748 3C11.1@139,8.748 ; v2@119,8.748 3C11.1@139,8.748 ; v2@119,8.748 3C11.1@139,8.748 ; v2@119,8.748 3C11.1@139,8.748 ; v2@119,8.748 3C11.1@139,8.748 ; v2@119,8.748 3C11.1@139,8.748 ; v2@119,8.748 3C11.1@139,8.748 ; v2@119,8.748 3C11.1@139,8.748 ; v2@119,8.748 3C11.1@139,8.748 ; v2@119,8.748 3C10.1@124,8.748 ; 3C10.1@124,8.748 3C11.1@139,8.748 ; 3C10.1@124,8.748 3C11.1@139,8.748 ; 3C10.1@124,8.748 3C11.1@139,8.748 ; 3C10.1@124,8.748 3C11.1@139,8.748 ; 3C10.1@124,8.748 3C11.1@139,8.748 ; 3C10.1@124,8.748 3C11.1@139,8.748 ; 3C10.1@124,8.748 3C11.1@139,8.748 ; 3C10.1@124,8.748 3C11.1@139,8.748 ; 3C10.1@124,8.748 3C11.1@139,8.748 ; 3C10.1@124,8.748 3C11.1@139,8.748 ; 3C10.1@124,8.748 3C11.1@139,8.748
  Top Layer w0.8: C25.1@112.75,159.3 C24.1@114.25,159.3 C23.1@115.75,159.3 C22.1@117.25,159.3 C21.1@118.75,159.3 C20.1@120.25,159.3 120.979,159.3 C19.1@121.75,159.3 C18.1@123.25,159.3 C16.1@124.75,159.3 C17.1@126.25,159.3 127.7,159.3 C64.1@127.75,159.35 128.85,159.35 v2(130.25,160.75) ; C26.1@121.45,162 C27.1@121.45,163.5 ; C26.1@121.45,162 C27.1@121.45,163.5 ; C26.1@121.45,162 C27.1@121.45,163.5 ; C26.1@121.45,162 C27.1@121.45,163.5 ; C26.1@121.45,162 C27.1@121.45,163.5 ; C26.1@121.45,162 C27.1@121.45,163.5 ; C26.1@121.45,162 C27.1@121.45,163.5 ; C26.1@121.45,162 C27.1@121.45,163.5 ; C26.1@121.45,162 C27.1@121.45,163.5 ; C26.1@121.45,162 C27.1@121.45,163.5 ; C26.1@121.45,162 C27.1@121.45,163.5 ; C26.1@121.45,162 C27.1@121.45,163.5 ; C26.1@121.45,162 C27.1@121.45,163.5 ; C26.1@121.45,162 C27.1@121.45,163.5
  Bottom Layer w0.254: v2(121.95,162) 122,162.05 122,163.3
  Bottom Layer w0.5: v2(29,8.8) 29,9.836 29.5,10.336 1U4.2@29.5,13.375 ; v2(44,8.8) 44,9.836 44.5,10.336 1U5.2@44.5,13.375 ; v2(74,8.8) 74,9.836 74.5,10.336 2U4.2@74.5,13.375 ; v2(89,8.8) 89,9.836 89.5,10.336 2U5.2@89.5,13.375 ; v2(119,8.8) 119,9.836 119.5,10.336 3U4.2@119.5,13.375 ; v2(134,8.8) 134,9.836 134.5,10.336 3U5.2@134.5,13.375
  Bottom Layer w0.8: R27.1@129.35,160.9 130.1,160.9 v2(130.25,160.75)
AVCC: 1C10.2 1C11.2 1U4.3 1U5.3 2C10.2 2C11.2 2U4.3 2U5.3 3C10.2 3C11.2 3U4.3 3U5.3 C26.2 C27.2 C45.2 C46.2 C47.2 C48.2 C49.2 C50.2 C51.2 C52.2 C64.2 L2.1 R25.2 U8.2 U8.9 U8.34 U8.35 U8.71 U8.107 U8.143 | length 1709.1
  Top Layer w0.5: 1C11.2@49,10.2 1C11.2@49,10.4 ; v2(28.5,10.4) v2(43.5,10.4) ; v2(28.5,10.4) v2(43.5,10.4) ; v2(28.5,10.4) v2(43.5,10.4) ; v2(28.5,10.4) v2(43.5,10.4) ; v2(28.5,10.4) v2(43.5,10.4) ; v2(28.5,10.4) v2(43.5,10.4) ; v2(28.5,10.4) v2(43.5,10.4) ; v2(28.5,10.4) v2(43.5,10.4) ; v2(28.5,10.4) v2(43.5,10.4) ; v2(28.5,10.4) v2(43.5,10.4) ; v2(28.5,10.4) v2(43.5,10.4) ; v2(28.5,10.4) v2(43.5,10.4) ; v2(28.5,10.4) 1C11.2@49,10.4 ; v2(28.5,10.4) v2(43.5,10.4) ; v2(43.5,10.4) 1C11.2@49,10.4 ; v2(43.5,10.4) 1C11.2@49,10.4 ; v2(43.5,10.4) 1C11.2@49,10.4 ; v2(43.5,10.4) 1C11.2@49,10.4 ; v2(43.5,10.4) 1C11.2@49,10.4 ; v2(43.5,10.4) 1C11.2@49,10.4 ; v2(43.5,10.4) 1C11.2@49,10.4 ; v2(43.5,10.4) 1C11.2@49,10.4 ; v2(43.5,10.4) 1C11.2@49,10.4 ; v2(43.5,10.4) 1C11.2@49,10.4 ; v2(43.5,10.4) 1C11.2@49,10.4 ; v2(43.5,10.4) 1C11.2@49,10.4 ; v2(43.5,10.4) 1C11.2@49,10.4 ; 1C11.2@49,10.4 v2(73.5,10.4) ; 1C11.2@49,10.4 v2(73.5,10.4) ; 1C11.2@49,10.4 v2(73.5,10.4) ; 1C11.2@49,10.4 v2(73.5,10.4) ; 1C11.2@49,10.4 v2(73.5,10.4) ; 1C11.2@49,10.4 v2(73.5,10.4) ; 1C11.2@49,10.4 v2(73.5,10.4) ; 1C11.2@49,10.4 v2(73.5,10.4) ; 1C11.2@49,10.4 v2(73.5,10.4) ; 1C11.2@49,10.4 v2(73.5,10.4) ; 1C11.2@49,10.4 v2(73.5,10.4) ; 1C11.2@49,10.4 v2(73.5,10.4) ; 1C11.2@49,10.4 v2(73.5,10.4) ; 1C11.2@49,10.4 v2(73.5,10.4) ; v2(73.5,10.4) 2C10.2@79,10.4 ; v2(73.5,10.4) 2C10.2@79,10.4 ; v2(73.5,10.4) 2C10.2@79,10.4 ; v2(73.5,10.4) 2C10.2@79,10.4 ; v2(73.5,10.4) 2C10.2@79,10.4 ; v2(73.5,10.4) 2C10.2@79,10.4 ; v2(73.5,10.4) 2C10.2@79,10.4 ; v2(73.5,10.4) 2C10.2@79,10.4 ; v2(73.5,10.4) 2C10.2@79,10.4 ; v2(73.5,10.4) 2C10.2@79,10.4 ; v2(73.5,10.4) 2C10.2@79,10.4 ; v2(73.5,10.4) 2C10.2@79,10.4 ; v2(73.5,10.4) 3C11.2@139,10.4 ; v2(73.5,10.4) 2C11.2@94,10.4 ; v2(73.5,10.4) 2C10.2@79,10.4 ; 2C10.2@79,10.4 v2(88.5,10.4) ; 2C10.2@79,10.4 v2(88.5,10.4) ; 2C10.2@79,10.4 v2(88.5,10.4) ; 2C10.2@79,10.4 v2(88.5,10.4) ; 2C10.2@79,10.4 v2(88.5,10.4) ; 2C10.2@79,10.4 v2(88.5,10.4) ; 2C10.2@79,10.4 v2(88.5,10.4) ; 2C10.2@79,10.4 v2(88.5,10.4) ; 2C10.2@79,10.4 v2(88.5,10.4) ; 2C10.2@79,10.4 v2(88.5,10.4) ; 2C10.2@79,10.4 v2(88.5,10.4) ; 2C10.2@79,10.4 v2(88.5,10.4) ; 2C10.2@79,10.4 v2(88.5,10.4) ; v2(88.5,10.4) 2C11.2@94,10.4 ; v2(88.5,10.4) 2C11.2@94,10.4 ; v2(88.5,10.4) 2C11.2@94,10.4 ; v2(88.5,10.4) 2C11.2@94,10.4 ; v2(88.5,10.4) 2C11.2@94,10.4 ; v2(88.5,10.4) 2C11.2@94,10.4 ; v2(88.5,10.4) 2C11.2@94,10.4 ; v2(88.5,10.4) 2C11.2@94,10.4 ; v2(88.5,10.4) 2C11.2@94,10.4 ; v2(88.5,10.4) 2C11.2@94,10.4 ; v2(88.5,10.4) 2C11.2@94,10.4 ; v2(88.5,10.4) 2C11.2@94,10.4 ; v2(88.5,10.4) 2C11.2@94,10.4 ; 2C11.2@94,10.4 v2(118.5,10.4) ; 2C11.2@94,10.4 v2(118.5,10.4) ; 2C11.2@94,10.4 v2(118.5,10.4) ; 2C11.2@94,10.4 v2(118.5,10.4) ; 2C11.2@94,10.4 v2(118.5,10.4) ; 2C11.2@94,10.4 v2(118.5,10.4) ; 2C11.2@94,10.4 v2(118.5,10.4) ; 2C11.2@94,10.4 v2(118.5,10.4) ; 2C11.2@94,10.4 v2(118.5,10.4) ; 2C11.2@94,10.4 v2(118.5,10.4) ; 2C11.2@94,10.4 v2(118.5,10.4) ; 2C11.2@94,10.4 v2(118.5,10.4) ; 2C11.2@94,10.4 v2(118.5,10.4) ; v2(118.5,10.4) v2(133.5,10.4) ; v2(118.5,10.4) v2(133.5,10.4) ; v2(118.5,10.4) v2(133.5,10.4) ; v2(118.5,10.4) v2(133.5,10.4) ; v2(118.5,10.4) v2(133.5,10.4) ; v2(118.5,10.4) v2(133.5,10.4) ; v2(118.5,10.4) v2(133.5,10.4) ; v2(118.5,10.4) v2(133.5,10.4) ; v2(118.5,10.4) v2(133.5,10.4) ; v2(118.5,10.4) v2(133.5,10.4) ; v2(118.5,10.4) v2(133.5,10.4) ; v2(118.5,10.4) v2(133.5,10.4) ; v2(118.5,10.4) v2(133.5,10.4) ; v2(133.5,10.4) 3C11.2@139,10.4 ; v2(133.5,10.4) 3C11.2@139,10.4 ; v2(133.5,10.4) 3C11.2@139,10.4 ; v2(133.5,10.4) 3C11.2@139,10.4 ; v2(133.5,10.4) 3C11.2@139,10.4 ; v2(133.5,10.4) 3C11.2@139,10.4 ; v2(133.5,10.4) 3C11.2@139,10.4 ; v2(133.5,10.4) 3C11.2@139,10.4 ; v2(133.5,10.4) 3C11.2@139,10.4 ; v2(133.5,10.4) 3C11.2@139,10.4 ; v2(133.5,10.4) 3C11.2@139,10.4 ; v2(133.5,10.4) 3C11.2@139,10.4 ; v2(133.5,10.4) 3C11.2@139,10.4
  Top Layer w0.8: 106.75,161.7 108.3,163.25 114.669,163.25 116.421,165.002 118.002,165.002 118.45,164.555 C47.2@118.45,164 ; C45.2@118.45,162.5 C47.2@118.45,164 ; C26.2@120.05,162 C27.2@120.05,163.5 118.95,163.5 C47.2@118.45,164
  Bottom Layer w0.3: 119.5,163.3 119.5,161.755 v2(119.536,161.72)
  Bottom Layer w0.5: v2(28.5,10.4) 28.848,10.748 ; v2(43.5,10.4) 43.848,10.748 1U5.3@43.848,13.373 ; v2(73.5,10.4) 73.848,10.748 ; v2(88.5,10.4) 88.848,10.748 2U5.3@88.848,13.373 ; v2(118.5,10.4) 118.848,10.748 ; v2(133.5,10.4) 133.848,10.748 3U5.3@133.848,13.373 ; 28.848,10.748 1U4.3@28.848,13.375 ; 28.848,10.748 1U4.3@28.848,13.375 ; 28.848,10.748 1U4.3@28.848,13.375 ; 28.848,10.748 1U4.3@28.848,13.375 ; 28.848,10.748 1U4.3@28.848,13.375 ; 28.848,10.748 1U4.3@28.848,13.375 ; 28.848,10.748 1U4.3@28.848,13.375 ; 28.848,10.748 1U4.3@28.848,13.375 ; 28.848,10.748 1U4.3@28.848,13.375 ; 28.848,10.748 1U4.3@28.848,13.375 ; 28.848,10.748 1U4.3@28.848,13.375 ; 28.848,10.748 1U4.3@28.848,13.375 ; 28.848,10.748 1U4.3@28.848,13.375 ; 28.848,10.748 1U4.3@28.848,13.375 ; 73.848,10.748 2U4.3@73.848,13.375 ; 73.848,10.748 2U4.3@73.848,13.375 ; 73.848,10.748 2U4.3@73.848,13.375 ; 73.848,10.748 2U4.3@73.848,13.375 ; 73.848,10.748 2U4.3@73.848,13.375 ; 73.848,10.748 2U4.3@73.848,13.375 ; 73.848,10.748 2U4.3@73.848,13.375 ; 73.848,10.748 2U4.3@73.848,13.375 ; 73.848,10.748 2U4.3@73.848,13.375 ; 73.848,10.748 2U4.3@73.848,13.375 ; 73.848,10.748 2U4.3@73.848,13.375 ; 73.848,10.748 2U4.3@73.848,13.375 ; 73.848,10.748 2U4.3@73.848,13.375 ; 73.848,10.748 2U4.3@73.848,13.375 ; 118.848,10.748 3U4.3@118.848,13.375 ; 118.848,10.748 3U4.3@118.848,13.375 ; 118.848,10.748 3U4.3@118.848,13.375 ; 118.848,10.748 3U4.3@118.848,13.375 ; 118.848,10.748 3U4.3@118.848,13.375 ; 118.848,10.748 3U4.3@118.848,13.375 ; 118.848,10.748 3U4.3@118.848,13.375 ; 118.848,10.748 3U4.3@118.848,13.375 ; 118.848,10.748 3U4.3@118.848,13.375 ; 118.848,10.748 3U4.3@118.848,13.375 ; 118.848,10.748 3U4.3@118.848,13.375 ; 118.848,10.748 3U4.3@118.848,13.375 ; 118.848,10.748 3U4.3@118.848,13.375 ; 118.848,10.748 3U4.3@118.848,13.375
CLK_50: U8.88 X1.3
CONF_DONE: R45.1 U8.138
CRC_ERROR: R38.2 U8.134